# EAGLE board keyboard (EAGLE 5.11)
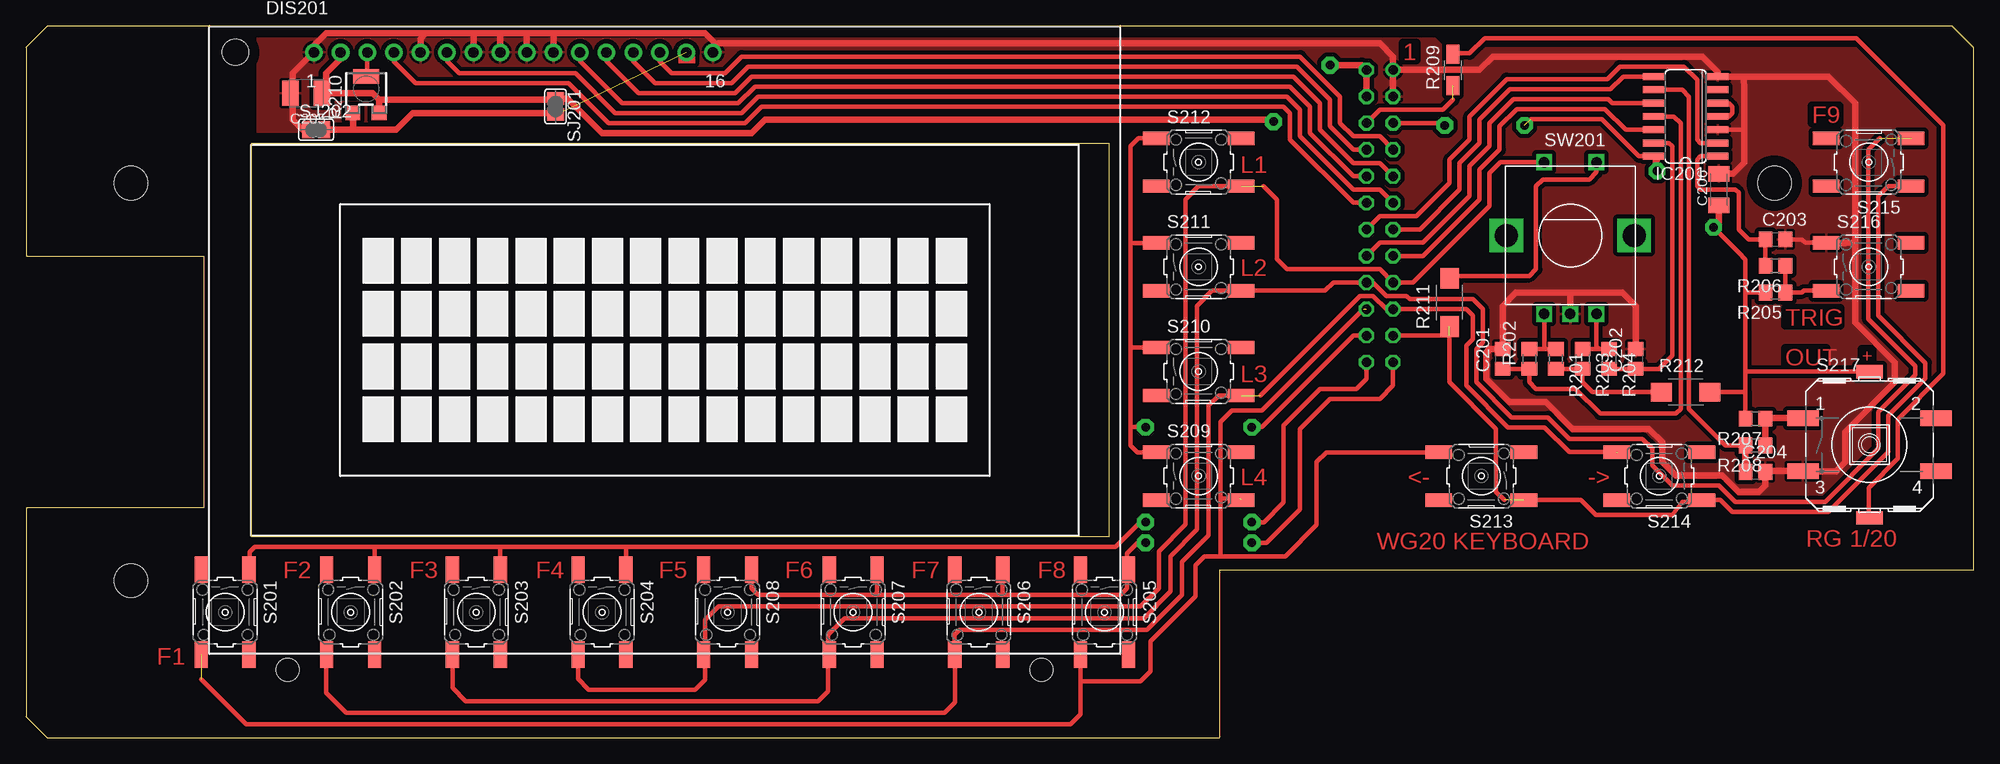
[diagram p0: board, top side]
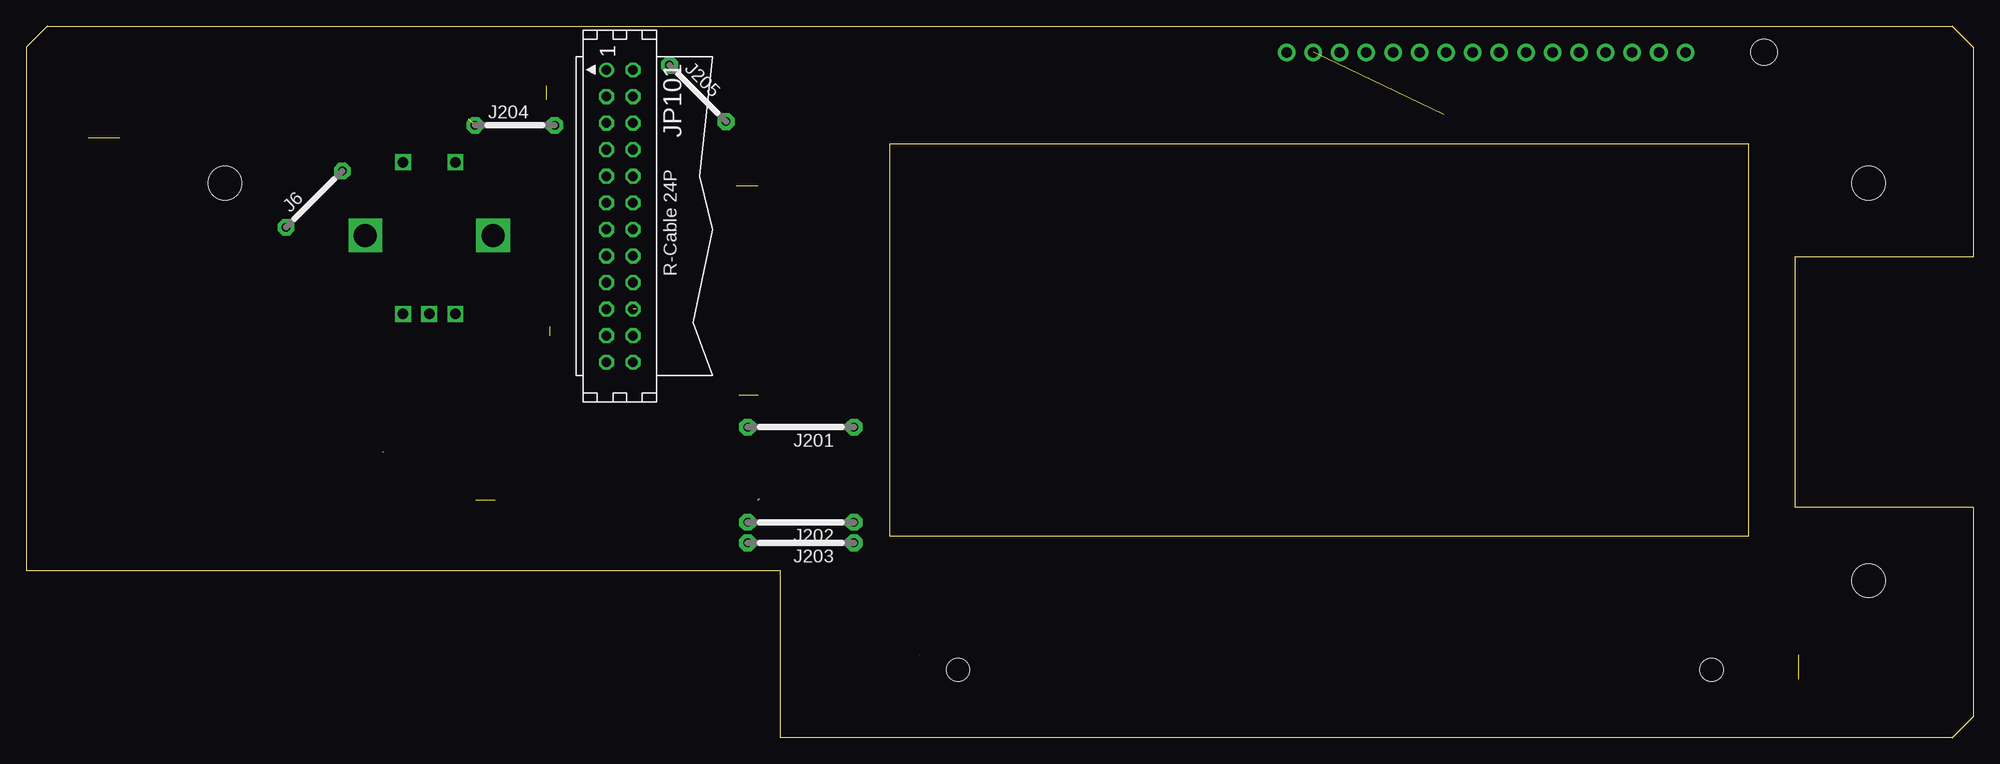
[diagram p1: board, bottom side, seen from below]

Size 186 x 68 mm. Coordinates in mm from the lower left corner, seen from the top.
Outline: 2,0 0,2 0,22 17,22 17,46 0,46 0,66 2,68 184,68 186,66 186,16 114,16 114,0 2,0
Outline: 103.5,56.75 21.5,56.75 21.5,19.25 103.5,19.25 103.5,56.75
Copper layers (1*16): Top 0.035mm / dielectric 1.5mm / Bottom 0.035mm
Design rules "default": minimum track width 10mil, minimum drill 24mil, track to track 8mil, track to pad 8mil, pad to pad 8mil, via to via 8mil, smd to smd 8mil, copper to edge 40mil, drill to drill 8mil, minimum pad ring 10mil, minimum via ring 8mil, stop-mask expansion 4mil, vias tented up to drill 0mil, thermal gap 10mil
Holes 3.2 mm at 10,53 10,15 167,53
Holes 2.2 mm at 25,6.5 97,6.5
Holes 2.5 mm at 20,65.5

## Footprints (pad centres in the part's own frame; a part is rotated, then mirrored left to right if it is on the bottom)
C0805 = smd 1.3 x 1.5: 1 -0.95,0; 2 0.95,0
SMC_B = smd 1.6 x 2.4: + -1.5,0; - 1.5,0
C1206K = smd 1.5 x 2: 1 -1.5,0; 2 1.5,0
RC1604A = drill 1 pad 1.676 round: 1 -33.5,27.5; 2 -30.96,27.5; 3 -28.42,27.5; 4 -25.88,27.5; 5 -23.34,27.5; 6 -20.8,27.5; 7 -18.26,27.5; 8 -15.72,27.5; 9 -13.18,27.5; 10 -10.64,27.5; 11 -8.1,27.5; 12 -5.56,27.5; 13 -3.02,27.5; 14 -0.48,27.5; 15 2.06,27.5; 16 4.6,27.5
SO14 = smd 0.66 x 2.032: 1 -3.81,-3.073; 2 -2.54,-3.073; 3 -1.27,-3.073; 4 0,-3.073; 5 1.27,-3.073; 6 2.54,-3.073; 7 3.81,-3.073; 8 3.81,3.073; 9 2.54,3.073; 10 1.27,3.073; 11 0,3.073; 12 -1.27,3.073; 13 -2.54,3.073; 14 -3.81,3.073
07 = drill 0.813 pad 1.6 octagon: 1 -3.81,0; 2 3.81,0
10 = drill 0.813 pad 1.6 octagon: 1 -5.08,0; 2 5.08,0
24L = drill 0.914 round: 1 -13.97,-1.27 | drill 0.914 octagon: 2 -13.97,1.27; 3 -11.43,-1.27; 4 -11.43,1.27; 5 -8.89,-1.27; 6 -8.89,1.27; 7 -6.35,-1.27; 8 -6.35,1.27; 9 -3.81,-1.27; 10 -3.81,1.27; 11 -1.27,-1.27; 12 -1.27,1.27; 13 1.27,-1.27; 14 1.27,1.27; 15 3.81,-1.27; 16 3.81,1.27; 17 6.35,-1.27; 18 6.35,1.27; 19 8.89,-1.27; 20 8.89,1.27; 21 11.43,-1.27; 22 11.43,1.27; 23 13.97,-1.27; 24 13.97,1.27
R0805 = smd 1.3 x 1.5: 1 -0.95,0; 2 0.95,0
R1206W = smd 1.8 x 1.2: 1 -1.499,0; 2 1.499,0
RTRIM3304W = smd 1.4 x 1.4: 1 -1.25,-1.9; 3 1.25,-1.9 | smd 2.5 x 1.4: 2 0,1.6
R2010W = smd 2 x 1.8: 1 -2.311,0; 2 2.311,0
B3F-10XX = smd 2.54 x 1.27: 1 -4.064,2.286; 2 4.064,2.286; 3 -4.064,-2.286; 4 4.064,-2.286
B3F-40XX = smd 3 x 1.5: 1 -6.35,2.54; 2 6.35,2.54; 3 -6.35,-2.54; 4 6.35,-2.54 | smd 2.54 x 1.27: 5 0,6.985; 6 0,-6.985
SJ = smd 1.168 x 1.6: 1 -0.762,0; 2 0.762,0
ALPS_EC12E_SW = drill 1 square: A -2.5,-7.5; B 2.5,-7.5; C 0,-7.5; D -2.5,7; E 2.5,7 | drill 2.2 square: GND1 -6.1,0; GND2 6.1,0

## Placement (x,y rotation side)
C201  100n  [C0805]  141.05,36.2 90 top
C202  100n  [C0805]  153.75,36.2 90 top
C203  100n  [C0805]  167.09,47.62 0 top
C204  100n  [C0805]  165.18,25.4 0 top
C205  10u/10V  [SMC_B]  26.75,61.59 180 top
C206  100n  [C1206K]  161.69,52.39 90 top
DIS201  RC1604A  [RC1604A]  61,38 0 top
IC201  74HC14D  [SO14]  158.51,59.37 90 top
J6  J7MM  [07]  158.49,51.47 45 bottom
J201  J10MM  [10]  112,29.68 180 bottom
J202  J10MM  [10]  112,20.59 180 bottom
J203  J10MM  [10]  112,18.62 180 bottom
J204  J7MM  [07]  139.32,58.52 0 bottom
J205  J7MM  [07]  121.85,61.58 315 bottom
JP101  24L  [24L]  129.3,49.85 270 bottom
R201  2k7  [R0805]  146.13,36.2 270 top
R202  6k8  [R0805]  143.59,36.2 90 top
R203  2k7  [R0805]  148.67,36.2 270 top
R204  6k8  [R0805]  151.21,36.2 270 top
R205  2k7  [R0805]  167.09,42.55 180 top
R206  6k8  [R0805]  167.09,45.09 180 top
R207  2k7  [R0805]  165.18,30.48 180 top
R208  6k8  [R0805]  165.18,27.94 180 top
R209  120R  [R1206W]  136.29,63.82 90 top
R210  10k  [RTRIM3304W]  32.46,61.59 0 top
R211  0R  [R2010W]  135.97,41.59 90 top
R212  0R  [R2010W]  158.51,33.02 0 top
S201  [B3F-10XX]  19,12 270 top
S202  [B3F-10XX]  31,12 270 top
S203  [B3F-10XX]  43,12 270 top
S204  [B3F-10XX]  55,12 270 top
S205  [B3F-10XX]  103,12 270 top
S206  [B3F-10XX]  91,12 270 top
S207  [B3F-10XX]  79,12 270 top
S208  [B3F-10XX]  67,12 270 top
S209  [B3F-10XX]  112,25 0 top
S210  [B3F-10XX]  112,35 0 top
S211  [B3F-10XX]  112,45 0 top
S212  [B3F-10XX]  112,55 0 top
S213  [B3F-10XX]  139,25 180 top
S214  [B3F-10XX]  156,25 180 top
S215  [B3F-10XX]  176,55 180 top
S216  [B3F-10XX]  176,45 0 top
S217  [B3F-40XX]  176.08,28 0 top
SJ201  [SJ]  50.56,60.33 270 top
SJ202  [SJ]  27.7,58.1 0 top
SW201  EC12E_SW  [ALPS_EC12E_SW]  147.5,48 0 top

## Library data of the parts
C201-C206 R201-R212 = rcl
DIS201 JP101 S201-S217 = wg_library
IC201 = 74xx-eu
J6 J201-J205 SJ201 SJ202 = jumper
SW201 = switch-alps; MPN: EC12E2424407; OC_FARNELL: 1520813; OC_NEWARK: 74M1068

## Nets
+3V3: C206.1 J6.1 R205.2 R207.2 R212.2 S217.5
+5V: C205.+ DIS201.2 J205.2 R210.3 SJ201.1
DB4: DIS201.11 JP101.10
DB5: DIS201.12 JP101.9
DB6: DIS201.13 JP101.8
DB7: DIS201.14 JP101.7
EN: DIS201.6 JP101.11
GND: C201.2 C202.2 C203.2 C204.2 C205.- C206.2 DIS201.1 DIS201.5 DIS201.7 DIS201.8 DIS201.9 DIS201.10 DIS201.16 IC201.3 IC201.7 JP101.1 JP101.3 S216.1 S217.3 SJ202.1 SW201.C
K01: IC201.8 JP101.13
K02: IC201.2 JP101.14
K03: IC201.12 JP101.15
K04: IC201.10 JP101.16
K05: JP101.17 S204.4 S208.4 S212.4 SW201.D
K06: JP101.18 S203.4 S207.4 S211.4 S215.3
K07: JP101.19 S202.4 S206.4 S210.4 S214.4
K08: JP101.20 S201.4 S205.4 S209.4 S213.4
K09: JP101.21 R211.1 S213.1 S214.1 S215.1
K10: J201.2 JP101.22
K11: J203.2 JP101.23
K12: J202.2 JP101.24
K101: J201.1 S209.1 S210.1 S211.1 S212.1
K111: J203.1 S205.1 S206.1 S207.1 S208.1
K121: J202.1 S201.1 S202.1 S203.1 S204.1
LED_OUT: JP101.6 R209.1
N$1: C201.1 IC201.11 R202.1
N$2: R201.1 R202.2 SW201.A
N$3: R203.1 R204.1 SW201.B
N$4: C202.1 IC201.13 R204.2
N$5: C203.1 IC201.1 R206.2
N$6: R205.1 R206.1 S216.3
N$7: R207.1 R208.1 S217.1
N$8: C204.1 IC201.9 R208.2
N$9: R209.2 S217.6
N$10: R211.2 SW201.E
N$11: R201.2 R203.2 R212.1
N$12: J204.2 JP101.5
N$13: J205.1 JP101.2 JP101.4
N$15: IC201.14 J6.2 J204.1
N$17: IC201.4 IC201.5
RS: DIS201.4 JP101.12
VNEG/A: DIS201.15 R210.1 SJ201.2 SJ202.2
VO: DIS201.3 R210.2

## Tracks (layer width: path | path; a pad name or v marks a point on that pad's centre or on a via)
+3V3
  Top 0.406: 164.23,42.55 164.23,45.72 163.58,46.35 163.58,46.38 J6.1 | 164.23,42.55 R205.2 | 164.23,33.02 R207.2 | 164.23,33.02 164.23,34.92 | 164.23,34.92 164.23,42.55 | 164.23,34.92 164.49,34.98 S217.5 | R212.2 164.23,33.02
  Top 0.61: R205.2 | C206.1 161.69,49.28 J6.1
+5V
  Top 0.61: 33.71,60.98 R210.3 | 33.71,60.98 33.1,61.59 C205.+ 28.65,62 28.65,63.5 30.04,64.89 DIS201.2 | 33.71,60.98 33.73,60.96 50.43,60.96 SJ201.1 51.71,61.09 55.01,57.78 69.3,57.78 70.56,59.05 118.98,59.05 J205.2
DB4
  Top 0.406: JP101.10 126.76,53.66 122.64,57.78 122.64,60.33 120.73,62.23 69.61,62.23 68.02,60.64 56.91,60.64 52.9,64.66 DIS201.11
DB5
  Top 0.406: JP101.9 129.3,54.93 126.76,54.93 123.59,58.1 123.59,60.64 121.05,63.18 69.3,63.18 67.71,61.59 58.5,61.59 55.44,64.66 DIS201.12
DB6
  Top 0.406: JP101.8 126.76,56.2 124.54,58.42 124.54,60.96 121.36,64.14 68.98,64.14 67.39,62.55 60.09,62.55 57.98,64.66 DIS201.13
DB7
  Top 0.406: JP101.7 129.3,57.47 126.76,57.47 125.49,58.74 125.49,61.28 121.68,65.09 68.34,65.09 66.75,63.5 61.67,63.5 60.52,64.66 DIS201.14
EN
  Top 0.406: JP101.11 129.3,52.39 126.76,52.39 121.68,57.47 121.68,60.01 120.41,61.28 69.93,61.28 68.34,59.69 56.28,59.69 52.47,63.5 41.35,63.5 40.2,64.66 DIS201.6
GND
  Top 0.406: C203.2 169.62,47.62 169.94,47.31 171.91,47.31 S216.1 | IC201.3 163.98,58.1 164.12,57.95
  Top 0.61: C201.2 | 147.4,42.55 142.32,42.55 141.05,41.27 C201.2 | C202.2 153.75,41.27 152.48,42.55 147.4,42.55 | SW201.C 147.5,42.45 147.4,42.55 | 38.18,67.31 28.65,67.31 27.5,66.16 DIS201.1 27.48,65.5 25.48,63.5 25.48,61.83 C205.- 25.48,61.37 25.48,59.05 26.43,58.1 SJ202.1 | DIS201.5 37.66,66.79 38.18,67.31 | 38.18,67.31 42.62,67.31 | 42.62,67.31 45.16,67.31 | 45.16,67.31 47.7,67.31 | 47.7,67.31 50.24,67.31 | DIS201.10 50.36,67.19 50.24,67.31 | DIS201.9 47.82,67.19 47.7,67.31 | DIS201.8 45.28,67.19 45.16,67.31 | DIS201.7 42.74,67.19 42.62,67.31 | 50.24,67.31 64.85,67.31 65.8,66.36 65.8,66.04 | JP101.1 130.57,65.09 129.3,66.36 66.12,66.36 65.8,66.04 | 174.71,47.31 174.71,39.69 178.52,35.88 178.52,33.97 173.75,29.21 173.75,26.35 172.91,25.51 172.91,25.46 S217.3 169.73,25.51 166.24,25.51 C204.2 166.13,24.13 165.5,23.5 163.59,23.5 162.01,25.08 157.56,25.08 156.29,26.35 156.29,28.26 155.02,29.53 147.72,29.53 145.18,32.07 141.69,32.07 139.46,34.29 139.46,36.83 139.78,37.15 C201.2 | S216.1 173.77,47.29 174.71,47.31 | JP101.1 JP101.3 | JP101.1 138.83,63.82 140.1,65.09 160.1,65.09 161.59,63.6 IC201.7 164.07,63.18 | C203.2 | 164.07,63.18 172.17,63.18 174.71,60.64 174.71,47.31 | C206.2 163.06,53.89 164.12,54.95 164.12,57.95 164.12,61.85 164.07,63.18 | 65.8,65.72 65.8,65.7 | 65.8,65.7 DIS201.16 | 65.8,65.7 65.82,65.7 65.8,65.72 | 65.8,66.04 65.8,65.72
  pour Top (isolate 0.406): 22,67.5 134,67.5 135.5,66 185,66 185,16 22,16
K01
  Top 0.406: IC201.8 152.55,63.18 151.34,61.98 141.75,61.98 138.83,59.05 138.83,56.83 136.92,54.93 136.92,52.39 133.11,48.58 JP101.13
K02
  Top 0.406: IC201.2 159.94,56.83 159.62,57.15 159.62,62.87 158.35,64.14 152.23,64.14 151.03,62.93 141.44,62.93 137.88,59.37 137.88,57.15 135.97,55.24 135.97,53.02 132.8,49.85 129.3,49.85 JP101.14
K03
  Top 0.406: IC201.12 152.8,58.1 150.83,60.08 142.39,60.08 140.73,58.42 140.73,56.2 138.83,54.29 138.83,51.44 133.43,46.04 JP101.15
K04
  Top 0.406: IC201.10 151.53,60.64 151.14,61.03 142.07,61.03 139.78,58.74 139.78,56.52 137.88,54.61 137.88,51.75 133.43,47.31 129.3,47.31 JP101.16
K05  (1 unrouted)
  Top 0.406: S204.4 52.71,5.63 53.74,4.6 63.9,4.6 64.85,5.56 64.85,7.8 S208.4 64.85,8.07 64.85,11.27 66.12,12.54 106.44,12.54 108.19,14.29 108.19,17.83 110.73,20.37 110.73,51.44 112,52.7 S212.4 | SW201.D 140.81,55 139.78,53.98 139.78,50.8 132.48,43.5 JP101.17 129.3,44.77 120.41,44.77 119.46,45.72 119.46,51.44 118.18,52.71
  Top 0.61: S212.4
K06  (1 unrouted)
  Top 0.406: S203.4 40.71,4.77 41.99,3.49 75.64,3.49 76.6,4.45 76.6,7.82 S207.4 76.6,8.05 76.6,9.84 78.19,11.43 106.76,11.43 109.3,13.97 109.3,17.35 111.84,19.89 111.84,41.27 113.28,42.71 S211.4 124.07,42.71 124.86,43.5 JP101.18 128.67,43.5 129.94,42.23 131.84,42.23 132.16,41.91 138.19,41.91 139.15,40.96 139.15,37.78 138.51,37.15 138.51,33.97 141.87,30.61 145.36,30.61 147.4,28.57 154.39,28.57 155.34,27.62 155.34,26.04 157.24,24.13 161.69,24.13 163.28,22.54 171.85,22.54 176.93,27.62 176.93,31.11 180.47,34.66 180.47,35.51 175.98,40.01 175.98,56.2 177.06,57.29
K07  (2 unrouted)
  Top 0.406: S202.4 28.65,7.88 28.65,4.29 30.56,2.38 87.71,2.38 88.71,3.38 S206.4 88.66,7.99 88.66,9.84 89.14,10.32 107.08,10.32 110.41,13.65 110.41,16.78 112.95,19.32 112.95,31.75 113.91,32.71 S210.4 | 117.88,32.71 127.4,42.23 128.67,42.23 129.94,40.96 JP101.19 137.56,40.96 138.19,40.32 138.19,38.1 137.56,37.47 137.56,33.66 141.55,29.66 145.04,29.66 147.4,27.3 151.92,27.3
K08  (4 unrouted)
  Top 0.406: 127.72,40.96 118.03,31.27 115.17,31.27 114.06,30.16 114.06,22.86 | 16.71,5.59 21.03,1.27 99.77,1.27 100.73,2.22 100.73,5.4 | 100.73,5.4 100.73,7.92 | 100.73,5.4 106.44,5.4 107.39,6.35 107.39,9.21 111.68,13.49 111.68,16.47 112.54,17.33 114.06,17.33 | 114.06,17.33 120.28,17.33 123.27,20.32 123.27,26.35 124.2,27.29 S213.4 | 114.06,22.86 115.97,22.86 | 114.06,17.33 114.06,22.86
K09  (2 unrouted)
  Top 0.406: S213.1 148.5,22.71 149.94,21.27 157.24,21.27 158.2,22.54 159.89,22.54 S214.1 161.83,22.71 162.96,21.59 172.17,21.59 177.88,27.3 177.88,30.8 181.42,34.34 181.42,35.83 176.93,40.32 176.93,51.75 177.89,52.71 S215.1 | JP101.21 135.97,38.42 135.97,33.97 140.42,29.53 140.42,23.5 141.2,22.71
K10
  Top 0.406: J201.2 118.03,29.68 126.76,38.42 JP101.22
K11
  Top 0.406: J203.2 118.47,18.62 121.68,21.84 121.68,29.53 124.54,32.38 129.3,32.38 130.57,33.66 JP101.23
K12
  Top 0.406: J202.2 118.21,20.59 120.09,22.48 120.09,29.84 123.59,33.34 127.08,33.34 128.03,34.29 JP101.24
K101
  Top 0.406: S209.1 106.14,27.29 105.49,27.94 105.49,29.68 | S212.1 106.26,57.29 105.49,56.52 105.49,47.31 | 105.49,37.47 105.49,47.31 | S210.1 105.67,37.29 105.49,37.47 | S211.1 105.51,47.29 105.49,47.31 | 105.49,29.68 J201.1 | 105.49,29.68 105.49,37.47
K111
  Top 0.406: S208.1 69.29,14.3 69.93,13.65 81.2,13.65 | 81.2,13.65 93.27,13.65 | 93.27,13.65 104.54,13.65 105.17,14.29 105.17,15.95 S205.1 105.17,16.18 105.17,17.62 106.17,18.62 J203.1 | S206.1 93.29,14.15 93.27,13.65 | S207.1 81.29,14.04 81.2,13.65
K121
  Top 0.406: 33.26,18.26 21.83,18.26 21.35,17.78 21.35,16.13 S201.1 | 33.26,18.26 45.32,18.26 | 45.32,18.26 57.23,18.26 | 57.23,18.26 104.06,18.26 106.4,20.59 J202.1 | S204.1 57.29,18.04 57.23,18.26 | S203.1 45.29,17.9 45.32,18.26 | S202.1 33.29,17.91 33.26,18.26
LED_OUT  (1 unrouted)
  Top 0.406: JP101.6 129.3,60.01 135.34,60.01 136.29,60.96
N$1
  Top 0.406: IC201.11 157.4,59.37 158.04,58.74 158.04,31.43 157.58,30.98 150.35,30.98 148,33.34 144.23,33.34 143.59,33.97 R202.1 C201.1
N$2
  Top 0.406: R202.2 145.18,37.15 | 145.18,37.15 R201.1 | SW201.A 145,37.32 145.18,37.15
N$3
  Top 0.406: R203.1 150.26,37.15 | 150.26,37.15 R204.1 | SW201.B 150,37.4 150.26,37.15
N$4
  Top 0.406: IC201.13 156.93,56.83 157.24,56.52 157.24,36.51 155.97,35.24 C202.1 R204.2
N$5
  Top 0.406: IC201.1 159.94,55.56 159.62,55.24 159.62,52.7 159.94,52.39 163.28,52.39 163.59,52.07 163.59,48.58 164.55,47.62 C203.1 R206.2
N$6
  Top 0.406: R206.1 R205.1 169.62,42.55 169.79,42.71 S216.3
N$7
  Top 0.61: R207.1 | R208.1 R207.1 | S217.1 166.13,30.54 R207.1
N$8
  Top 0.406: IC201.9 158.2,61.91 158.83,61.28 158.83,31.43 162.32,27.94 R208.2
  Top 0.61: C204.1 R208.2
N$9
  Top 0.406: R209.2 136.38,65.41 137.88,65.41 139.33,66.86 174.84,66.86 183.14,58.55 183.14,34.79 178.79,30.43 178.79,26.67 176,23.89 176,21.02 S217.6
N$10
  Top 0.406: SW201.E 150,54.03 149.31,53.34 144.86,53.34 144.23,52.7 144.23,44.77 143.59,44.13 136.2,44.13 R211.2
N$11
  Top 0.406: R212.1 149.62,33.02 148.67,33.97 R203.2 R201.2
N$12
  Top 0.406: JP101.5 135.3,58.74 J204.2
N$13
  Top 0.61: JP101.2 JP101.4 | JP101.2 127.71,64.14 | J205.1 127.58,64.27 JP101.2
N$15  (1 unrouted)
  Top 0.406: 155.97,55.46 IC201.14 154.07,55.56 150.51,59.12 143.73,59.12
  Top 0.61: IC201.14 155.78,55.22 155.66,55.09 155.66,54.29 155.78,54.16 J6.2
N$17
  Top 0.406: IC201.5 162.64,60.64 162.96,60.33 162.96,59.69 162.64,59.37 IC201.4
RS
  Top 0.406: JP101.12 126.76,51.12 120.73,57.15 120.73,59.69 120.09,60.33 70.25,60.33 68.66,58.74 55.64,58.74 51.83,62.55 37.23,62.55 35.12,64.66 DIS201.4
VNEG/A  (1 unrouted)
  Top 0.61: 31.21,58.31 R210.1 31.21,58.12 31.19,58.1 | 31.19,58.1 35.32,58.1 36.91,59.69 50.43,59.69 SJ201.2 | SJ202.2 31.19,58.1
VO
  Top 0.406: 32.58,63.31 DIS201.3
  Top 0.61: R210.2 32.58,63.31
(copper drawn outside any net)
  shapes: Top area x1

## Text on the board
Top: 1 | F9 | L1 | L2 | TRIG | OUT | + | L3 | L4 | <- | -> | WG20 KEYBOARD | RG 1/20 | F2 | F3 | F4 | F5 | F6 | F7 | F8 | F1